# EAGLE board Thermostat_ADT6401_Breakout-Panel (EAGLE 9.6.0), part 1 of 2
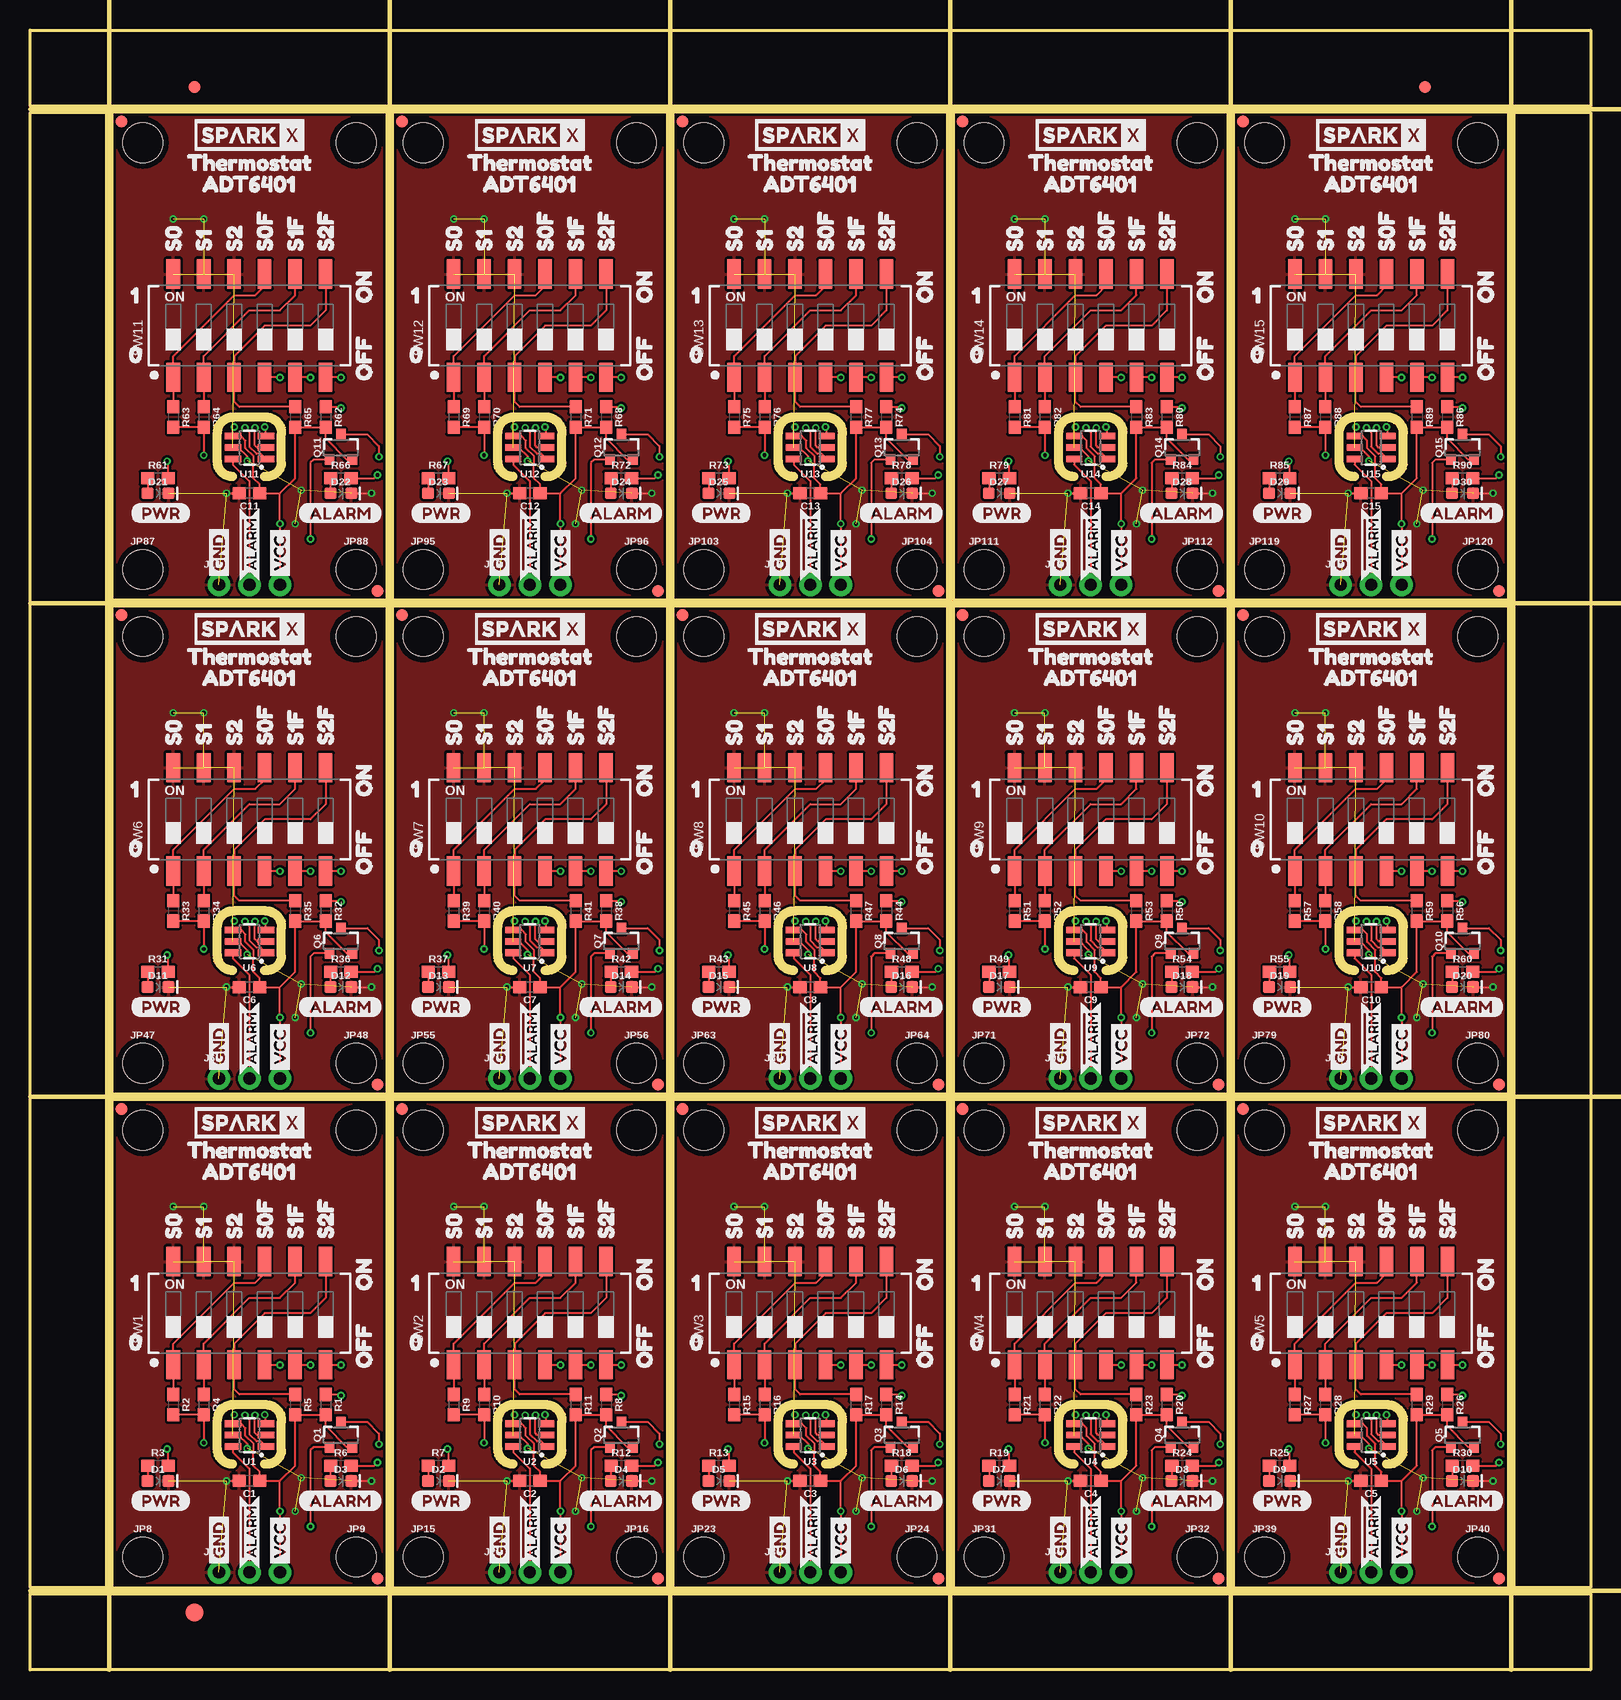
[diagram p0: board, top side]
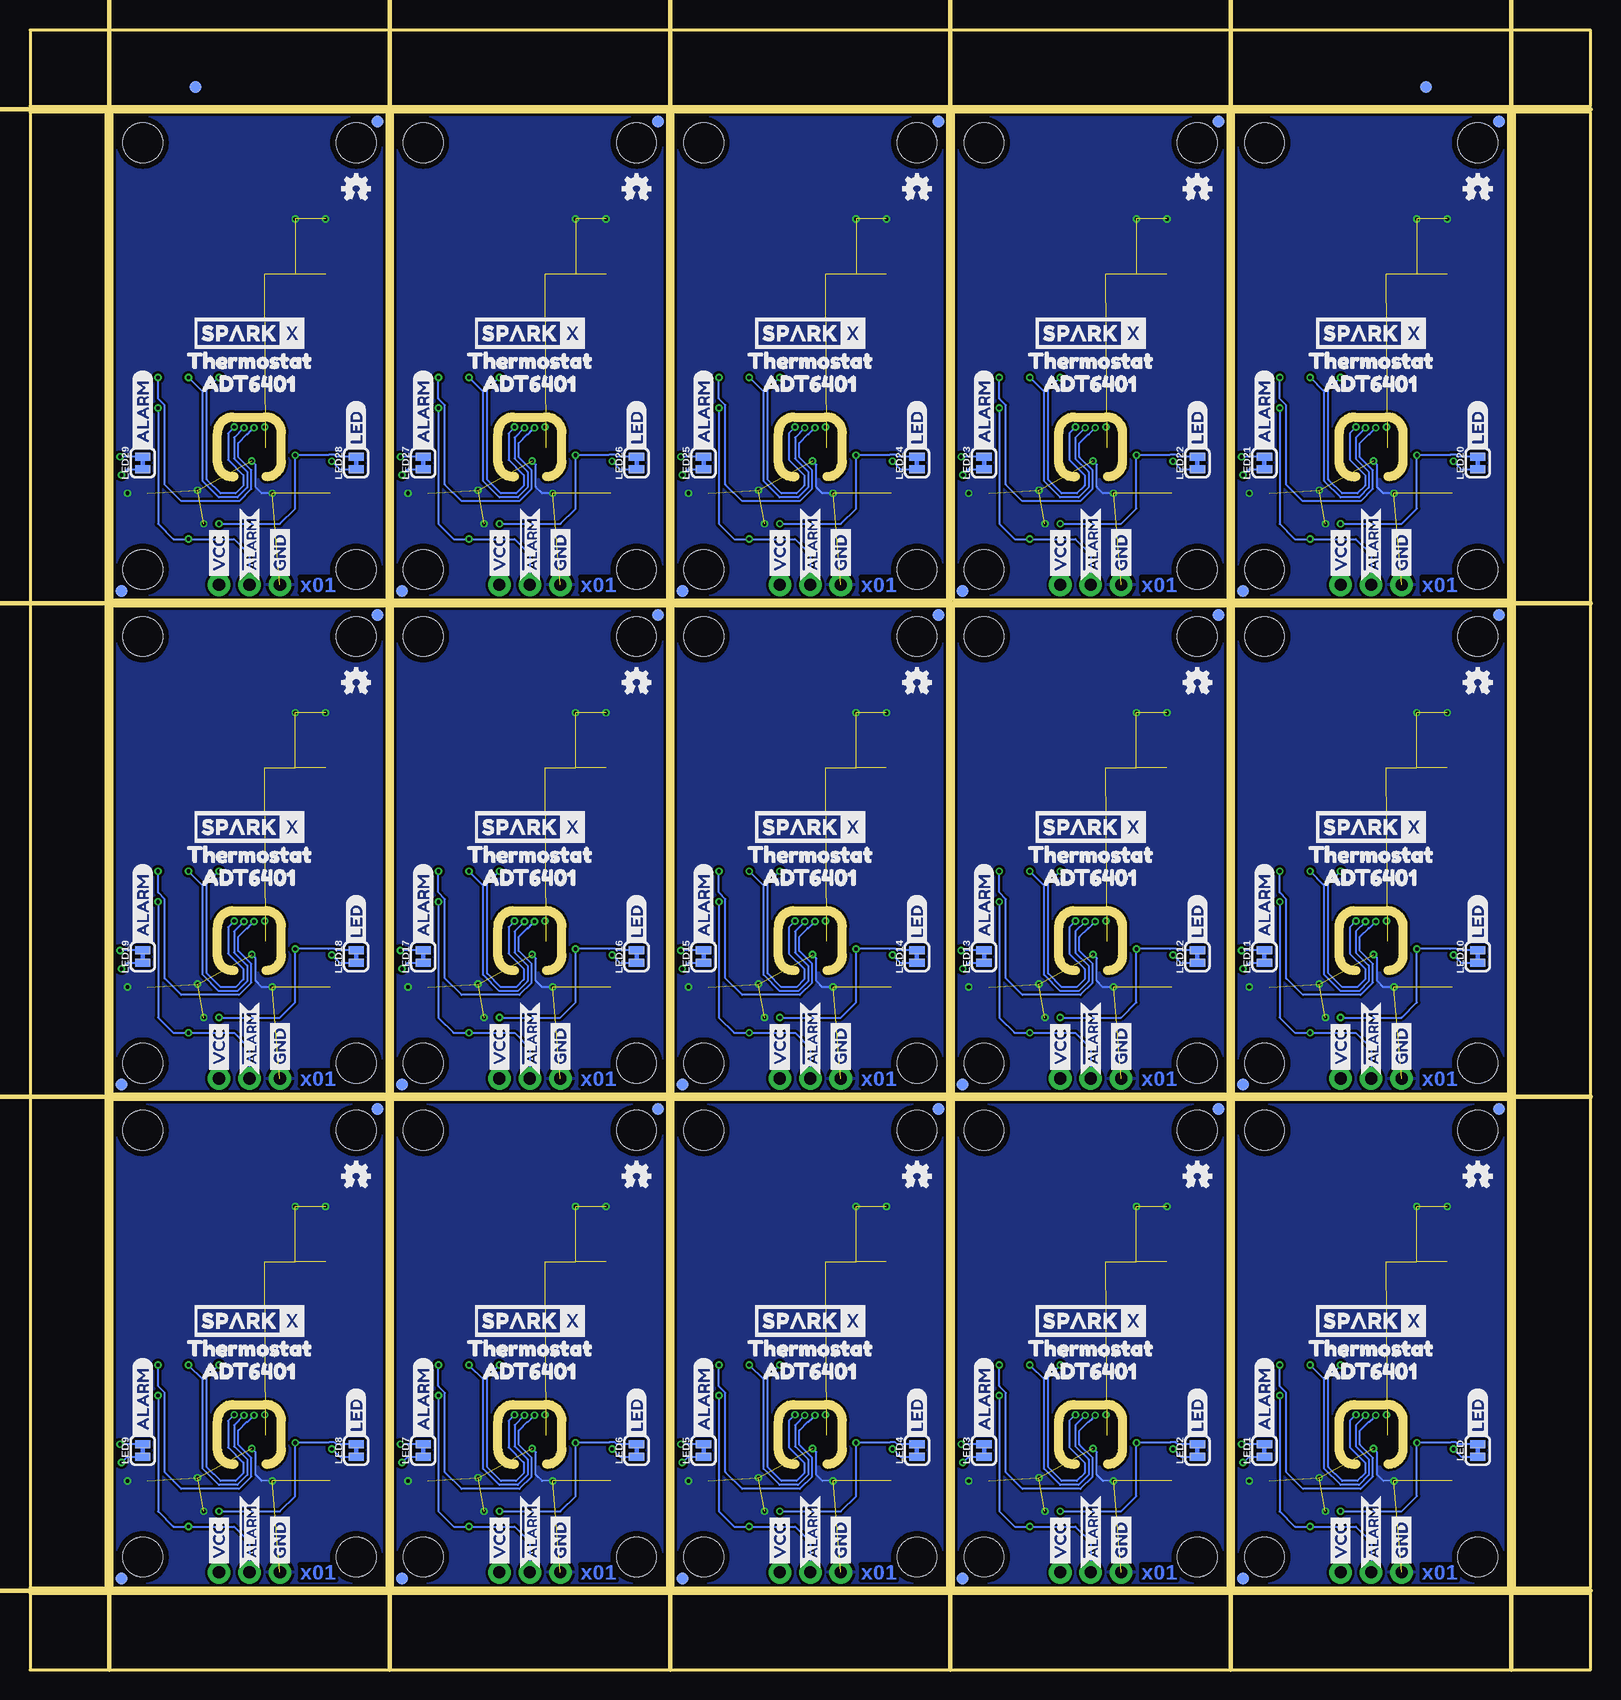
[diagram p1: board, bottom side, seen from below]

Size 130.05 x 136.65 mm. Coordinates in mm from the lower left corner, seen from the top.
Outline: 181 segments
Copper layers (1*16): Top 0.035mm / dielectric 1.5mm / Bottom 0.035mm
Design rules "Thermostat_ADT6401_Breakout": minimum track width 6mil, minimum drill 0.3mm, track to track 6mil, track to pad 6mil, pad to pad 6mil, via to via 6mil, smd to smd 6mil, copper to edge 6mil, drill to drill 6mil, minimum pad ring 6mil, minimum via ring 6mil, stop-mask expansion 4mil, vias tented up to drill 25mil, thermal gap 10mil
Milling: 10 lines

## Footprints (pad centres in the part's own frame; a part is rotated, then mirrored left to right if it is on the bottom)
0603 = smd 1.1 x 1: 1 -0.85,0; 2 0.85,0
LED-0603 = smd 1 x 1: A -0.877,0; C 0.877,0
FIDUCIAL-1X2 = smd 1 x 1: 1 0,0
FIDUCIAL-1.5X3 = smd 1.5 x 1.5: 1 0,0
1X03_NO_SILK = drill 1.016 pad 1.88: 1 0,0; 2 2.54,0; 3 5.08,0
STAND-OFF = hole 3.302: 0,0
SMT-JUMPER_2_NC_TRACE_SILK = smd 0.66 x 1.27: 1 -0.521,0; 2 0.521,0
SOT23-3 = smd 0.8 x 0.9: 1 -0.95,-1; 2 0.95,-1; 3 0,1.1
DIPSWITCH-06-SMD = smd 1.13 x 2.44: 1 -6.35,-4.3; 2 -3.81,-4.3; 3 -1.27,-4.3; 4 1.27,-4.3; 5 3.81,-4.3; 6 6.35,-4.3; 7 6.35,4.3; 8 3.81,4.3; 9 1.27,4.3; 10 -1.27,4.3; 11 -3.81,4.3; 12 -6.35,4.3
SOT23-6 = smd 0.55 x 1.35: 1 -0.95,-1.375; 2 0,-1.375; 3 0.95,-1.375; 4 0.95,1.375; 5 0,1.375; 6 -0.95,1.375

## Placement (x,y rotation side)
C1  0.1uF  [0603]  18.29,15.75 180 top
C2  0.1uF  [0603]  41.66,15.75 180 top
C3  0.1uF  [0603]  65.02,15.75 180 top
C4  0.1uF  [0603]  88.39,15.75 180 top
C5  0.1uF  [0603]  111.76,15.75 180 top
C6  0.1uF  [0603]  18.29,56.9 180 top
C7  0.1uF  [0603]  41.66,56.9 180 top
C8  0.1uF  [0603]  65.02,56.9 180 top
C9  0.1uF  [0603]  88.39,56.9 180 top
C10  0.1uF  [0603]  111.76,56.9 180 top
C11  0.1uF  [0603]  18.29,98.04 180 top
C12  0.1uF  [0603]  41.66,98.04 180 top
C13  0.1uF  [0603]  65.02,98.04 180 top
C14  0.1uF  [0603]  88.39,98.04 180 top
C15  0.1uF  [0603]  111.76,98.04 180 top
D1  RED  [LED-0603]  10.67,15.75 0 top
D2  RED  [LED-0603]  34.04,15.75 0 top
D3  Yellow  [LED-0603]  25.91,15.75 0 top
D4  Yellow  [LED-0603]  49.28,15.75 0 top
D5  RED  [LED-0603]  57.4,15.75 0 top
D6  Yellow  [LED-0603]  72.64,15.75 0 top
D7  RED  [LED-0603]  80.77,15.75 0 top
D8  Yellow  [LED-0603]  96.01,15.75 0 top
D9  RED  [LED-0603]  104.14,15.75 0 top
D10  Yellow  [LED-0603]  119.38,15.75 0 top
D11  RED  [LED-0603]  10.67,56.9 0 top
D12  Yellow  [LED-0603]  25.91,56.9 0 top
D13  RED  [LED-0603]  34.04,56.9 0 top
D14  Yellow  [LED-0603]  49.28,56.9 0 top
D15  RED  [LED-0603]  57.4,56.9 0 top
D16  Yellow  [LED-0603]  72.64,56.9 0 top
D17  RED  [LED-0603]  80.77,56.9 0 top
D18  Yellow  [LED-0603]  96.01,56.9 0 top
D19  RED  [LED-0603]  104.14,56.9 0 top
D20  Yellow  [LED-0603]  119.38,56.9 0 top
D21  RED  [LED-0603]  10.67,98.04 0 top
D22  Yellow  [LED-0603]  25.91,98.04 0 top
D23  RED  [LED-0603]  34.04,98.04 0 top
D24  Yellow  [LED-0603]  49.28,98.04 0 top
D25  RED  [LED-0603]  57.4,98.04 0 top
D26  Yellow  [LED-0603]  72.64,98.04 0 top
D27  RED  [LED-0603]  80.77,98.04 0 top
D28  Yellow  [LED-0603]  96.01,98.04 0 top
D29  RED  [LED-0603]  104.14,98.04 0 top
D30  Yellow  [LED-0603]  119.38,98.04 0 top
E$1  [FIDUCIAL-1X2]  13.72,131.89 0 top
E$2  [FIDUCIAL-1X2]  13.72,131.89 0 bottom
E$3  [FIDUCIAL-1X2]  116.27,131.89 0 top
E$4  [FIDUCIAL-1X2]  116.27,131.89 0 bottom
E$5  [FIDUCIAL-1.5X3]  13.72,4.76 0 top
J1  [1X03_NO_SILK]  15.75,8.13 0 top
J2  [1X03_NO_SILK]  39.12,8.13 0 top
J3  [1X03_NO_SILK]  62.48,8.13 0 top
J4  [1X03_NO_SILK]  85.85,8.13 0 top
J5  [1X03_NO_SILK]  109.22,8.13 0 top
J6  [1X03_NO_SILK]  15.75,49.28 0 top
J7  [1X03_NO_SILK]  39.12,49.28 0 top
J8  [1X03_NO_SILK]  62.48,49.28 0 top
J9  [1X03_NO_SILK]  85.85,49.28 0 top
J10  [1X03_NO_SILK]  109.22,49.28 0 top
J11  [1X03_NO_SILK]  15.75,90.42 0 top
J12  [1X03_NO_SILK]  39.12,90.42 0 top
J13  [1X03_NO_SILK]  62.48,90.42 0 top
J14  [1X03_NO_SILK]  85.85,90.42 0 top
J15  [1X03_NO_SILK]  109.22,90.42 0 top
JP1  FIDUCIAL1X2  [FIDUCIAL-1X2]  7.62,46.74 0 bottom
JP2  FIDUCIAL1X2  [FIDUCIAL-1X2]  28.96,7.62 0 top
JP3  STAND-OFF  [STAND-OFF]  9.4,44.96 0 top
JP4  STAND-OFF  [STAND-OFF]  27.18,44.96 0 top
JP5  FIDUCIAL1X2  [FIDUCIAL-1X2]  28.96,7.62 0 bottom
JP6  FIDUCIAL1X2  [FIDUCIAL-1X2]  7.62,46.74 0 top
JP7  STAND-OFF  [STAND-OFF]  32.77,44.96 0 top
JP8  STAND-OFF  [STAND-OFF]  9.4,9.4 0 top
JP9  STAND-OFF  [STAND-OFF]  27.18,9.4 0 top
JP10  STAND-OFF  [STAND-OFF]  50.55,44.96 0 top
JP11  FIDUCIAL1X2  [FIDUCIAL-1X2]  52.32,7.62 0 top
JP12  FIDUCIAL1X2  [FIDUCIAL-1X2]  30.99,46.74 0 top
JP13  FIDUCIAL1X2  [FIDUCIAL-1X2]  30.99,46.74 0 bottom
JP14  FIDUCIAL1X2  [FIDUCIAL-1X2]  52.32,7.62 0 bottom
JP15  STAND-OFF  [STAND-OFF]  32.77,9.4 0 top
JP16  STAND-OFF  [STAND-OFF]  50.55,9.4 0 top
JP17  STAND-OFF  [STAND-OFF]  56.13,44.96 0 top
JP18  STAND-OFF  [STAND-OFF]  73.91,44.96 0 top
JP19  FIDUCIAL1X2  [FIDUCIAL-1X2]  75.69,7.62 0 top
JP20  FIDUCIAL1X2  [FIDUCIAL-1X2]  54.36,46.74 0 top
JP21  FIDUCIAL1X2  [FIDUCIAL-1X2]  54.36,46.74 0 bottom
JP22  FIDUCIAL1X2  [FIDUCIAL-1X2]  75.69,7.62 0 bottom
JP23  STAND-OFF  [STAND-OFF]  56.13,9.4 0 top
JP24  STAND-OFF  [STAND-OFF]  73.91,9.4 0 top
JP25  STAND-OFF  [STAND-OFF]  79.5,44.96 0 top
JP26  STAND-OFF  [STAND-OFF]  97.28,44.96 0 top
JP27  FIDUCIAL1X2  [FIDUCIAL-1X2]  99.06,7.62 0 top
JP28  FIDUCIAL1X2  [FIDUCIAL-1X2]  77.72,46.74 0 top
JP29  FIDUCIAL1X2  [FIDUCIAL-1X2]  77.72,46.74 0 bottom
JP30  FIDUCIAL1X2  [FIDUCIAL-1X2]  99.06,7.62 0 bottom
JP31  STAND-OFF  [STAND-OFF]  79.5,9.4 0 top
JP32  STAND-OFF  [STAND-OFF]  97.28,9.4 0 top
JP33  STAND-OFF  [STAND-OFF]  102.87,44.96 0 top
JP34  STAND-OFF  [STAND-OFF]  120.65,44.96 0 top
JP35  FIDUCIAL1X2  [FIDUCIAL-1X2]  122.43,7.62 0 top
JP36  FIDUCIAL1X2  [FIDUCIAL-1X2]  101.09,46.74 0 top
JP37  FIDUCIAL1X2  [FIDUCIAL-1X2]  101.09,46.74 0 bottom
JP38  FIDUCIAL1X2  [FIDUCIAL-1X2]  122.43,7.62 0 bottom
JP39  STAND-OFF  [STAND-OFF]  102.87,9.4 0 top
JP40  STAND-OFF  [STAND-OFF]  120.65,9.4 0 top
JP41  STAND-OFF  [STAND-OFF]  9.4,86.11 0 top
JP42  STAND-OFF  [STAND-OFF]  27.18,86.11 0 top
JP43  FIDUCIAL1X2  [FIDUCIAL-1X2]  28.96,48.77 0 top
JP44  FIDUCIAL1X2  [FIDUCIAL-1X2]  7.62,87.88 0 top
JP45  FIDUCIAL1X2  [FIDUCIAL-1X2]  7.62,87.88 0 bottom
JP46  FIDUCIAL1X2  [FIDUCIAL-1X2]  28.96,48.77 0 bottom
JP47  STAND-OFF  [STAND-OFF]  9.4,50.55 0 top
JP48  STAND-OFF  [STAND-OFF]  27.18,50.55 0 top
JP49  STAND-OFF  [STAND-OFF]  32.77,86.11 0 top
JP50  STAND-OFF  [STAND-OFF]  50.55,86.11 0 top
JP51  FIDUCIAL1X2  [FIDUCIAL-1X2]  52.32,48.77 0 top
JP52  FIDUCIAL1X2  [FIDUCIAL-1X2]  30.99,87.88 0 top
JP53  FIDUCIAL1X2  [FIDUCIAL-1X2]  30.99,87.88 0 bottom
JP54  FIDUCIAL1X2  [FIDUCIAL-1X2]  52.32,48.77 0 bottom
JP55  STAND-OFF  [STAND-OFF]  32.77,50.55 0 top
JP56  STAND-OFF  [STAND-OFF]  50.55,50.55 0 top
JP57  STAND-OFF  [STAND-OFF]  56.13,86.11 0 top
JP58  STAND-OFF  [STAND-OFF]  73.91,86.11 0 top
JP59  FIDUCIAL1X2  [FIDUCIAL-1X2]  75.69,48.77 0 top
JP60  FIDUCIAL1X2  [FIDUCIAL-1X2]  54.36,87.88 0 top
JP61  FIDUCIAL1X2  [FIDUCIAL-1X2]  54.36,87.88 0 bottom
JP62  FIDUCIAL1X2  [FIDUCIAL-1X2]  75.69,48.77 0 bottom
JP63  STAND-OFF  [STAND-OFF]  56.13,50.55 0 top
JP64  STAND-OFF  [STAND-OFF]  73.91,50.55 0 top
JP65  STAND-OFF  [STAND-OFF]  79.5,86.11 0 top
JP66  STAND-OFF  [STAND-OFF]  97.28,86.11 0 top
JP67  FIDUCIAL1X2  [FIDUCIAL-1X2]  99.06,48.77 0 top
JP68  FIDUCIAL1X2  [FIDUCIAL-1X2]  77.72,87.88 0 top
JP69  FIDUCIAL1X2  [FIDUCIAL-1X2]  77.72,87.88 0 bottom
JP70  FIDUCIAL1X2  [FIDUCIAL-1X2]  99.06,48.77 0 bottom
JP71  STAND-OFF  [STAND-OFF]  79.5,50.55 0 top
JP72  STAND-OFF  [STAND-OFF]  97.28,50.55 0 top
JP73  STAND-OFF  [STAND-OFF]  102.87,86.11 0 top
JP74  STAND-OFF  [STAND-OFF]  120.65,86.11 0 top
JP75  FIDUCIAL1X2  [FIDUCIAL-1X2]  122.43,48.77 0 top
JP76  FIDUCIAL1X2  [FIDUCIAL-1X2]  101.09,87.88 0 top
JP77  FIDUCIAL1X2  [FIDUCIAL-1X2]  101.09,87.88 0 bottom
JP78  FIDUCIAL1X2  [FIDUCIAL-1X2]  122.43,48.77 0 bottom
JP79  STAND-OFF  [STAND-OFF]  102.87,50.55 0 top
JP80  STAND-OFF  [STAND-OFF]  120.65,50.55 0 top
JP81  STAND-OFF  [STAND-OFF]  9.4,127.25 0 top
JP82  STAND-OFF  [STAND-OFF]  27.18,127.25 0 top
JP83  FIDUCIAL1X2  [FIDUCIAL-1X2]  28.96,89.92 0 top
JP84  FIDUCIAL1X2  [FIDUCIAL-1X2]  7.62,129.03 0 top
JP85  FIDUCIAL1X2  [FIDUCIAL-1X2]  7.62,129.03 0 bottom
JP86  FIDUCIAL1X2  [FIDUCIAL-1X2]  28.96,89.92 0 bottom
JP87  STAND-OFF  [STAND-OFF]  9.4,91.69 0 top
JP88  STAND-OFF  [STAND-OFF]  27.18,91.69 0 top
JP89  STAND-OFF  [STAND-OFF]  32.77,127.25 0 top
JP90  STAND-OFF  [STAND-OFF]  50.55,127.25 0 top
JP91  FIDUCIAL1X2  [FIDUCIAL-1X2]  52.32,89.92 0 top
JP92  FIDUCIAL1X2  [FIDUCIAL-1X2]  30.99,129.03 0 top
JP93  FIDUCIAL1X2  [FIDUCIAL-1X2]  30.99,129.03 0 bottom
JP94  FIDUCIAL1X2  [FIDUCIAL-1X2]  52.32,89.92 0 bottom
JP95  STAND-OFF  [STAND-OFF]  32.77,91.69 0 top
JP96  STAND-OFF  [STAND-OFF]  50.55,91.69 0 top
JP97  STAND-OFF  [STAND-OFF]  56.13,127.25 0 top
JP98  STAND-OFF  [STAND-OFF]  73.91,127.25 0 top
JP99  FIDUCIAL1X2  [FIDUCIAL-1X2]  75.69,89.92 0 top
JP100  FIDUCIAL1X2  [FIDUCIAL-1X2]  54.36,129.03 0 top
JP101  FIDUCIAL1X2  [FIDUCIAL-1X2]  54.36,129.03 0 bottom
JP102  FIDUCIAL1X2  [FIDUCIAL-1X2]  75.69,89.92 0 bottom
JP103  STAND-OFF  [STAND-OFF]  56.13,91.69 0 top
JP104  STAND-OFF  [STAND-OFF]  73.91,91.69 0 top
JP105  STAND-OFF  [STAND-OFF]  79.5,127.25 0 top
JP106  STAND-OFF  [STAND-OFF]  97.28,127.25 0 top
JP107  FIDUCIAL1X2  [FIDUCIAL-1X2]  99.06,89.92 0 top
JP108  FIDUCIAL1X2  [FIDUCIAL-1X2]  77.72,129.03 0 top
JP109  FIDUCIAL1X2  [FIDUCIAL-1X2]  77.72,129.03 0 bottom
JP110  FIDUCIAL1X2  [FIDUCIAL-1X2]  99.06,89.92 0 bottom
JP111  STAND-OFF  [STAND-OFF]  79.5,91.69 0 top
JP112  STAND-OFF  [STAND-OFF]  97.28,91.69 0 top
JP113  STAND-OFF  [STAND-OFF]  102.87,127.25 0 top
JP114  STAND-OFF  [STAND-OFF]  120.65,127.25 0 top
JP115  FIDUCIAL1X2  [FIDUCIAL-1X2]  122.43,89.92 0 top
JP116  FIDUCIAL1X2  [FIDUCIAL-1X2]  101.09,129.03 0 top
JP117  FIDUCIAL1X2  [FIDUCIAL-1X2]  101.09,129.03 0 bottom
JP118  FIDUCIAL1X2  [FIDUCIAL-1X2]  122.43,89.92 0 bottom
JP119  STAND-OFF  [STAND-OFF]  102.87,91.69 0 top
JP120  STAND-OFF  [STAND-OFF]  120.65,91.69 0 top
LED  [SMT-JUMPER_2_NC_TRACE_SILK]  9.4,18.29 90 bottom
LED1  [SMT-JUMPER_2_NC_TRACE_SILK]  27.18,18.29 90 bottom
LED2  [SMT-JUMPER_2_NC_TRACE_SILK]  32.77,18.29 90 bottom
LED3  [SMT-JUMPER_2_NC_TRACE_SILK]  50.55,18.29 90 bottom
LED4  [SMT-JUMPER_2_NC_TRACE_SILK]  56.13,18.29 90 bottom
LED5  [SMT-JUMPER_2_NC_TRACE_SILK]  73.91,18.29 90 bottom
LED6  [SMT-JUMPER_2_NC_TRACE_SILK]  79.5,18.29 90 bottom
LED7  [SMT-JUMPER_2_NC_TRACE_SILK]  97.28,18.29 90 bottom
LED8  [SMT-JUMPER_2_NC_TRACE_SILK]  102.87,18.29 90 bottom
LED9  [SMT-JUMPER_2_NC_TRACE_SILK]  120.65,18.29 90 bottom
LED10  [SMT-JUMPER_2_NC_TRACE_SILK]  9.4,59.44 90 bottom
LED11  [SMT-JUMPER_2_NC_TRACE_SILK]  27.18,59.44 90 bottom
LED12  [SMT-JUMPER_2_NC_TRACE_SILK]  32.77,59.44 90 bottom
LED13  [SMT-JUMPER_2_NC_TRACE_SILK]  50.55,59.44 90 bottom
LED14  [SMT-JUMPER_2_NC_TRACE_SILK]  56.13,59.44 90 bottom
LED15  [SMT-JUMPER_2_NC_TRACE_SILK]  73.91,59.44 90 bottom
LED16  [SMT-JUMPER_2_NC_TRACE_SILK]  79.5,59.44 90 bottom
LED17  [SMT-JUMPER_2_NC_TRACE_SILK]  97.28,59.44 90 bottom
LED18  [SMT-JUMPER_2_NC_TRACE_SILK]  102.87,59.44 90 bottom
LED19  [SMT-JUMPER_2_NC_TRACE_SILK]  120.65,59.44 90 bottom
LED20  [SMT-JUMPER_2_NC_TRACE_SILK]  9.4,100.58 90 bottom
LED21  [SMT-JUMPER_2_NC_TRACE_SILK]  27.18,100.58 90 bottom
LED22  [SMT-JUMPER_2_NC_TRACE_SILK]  32.77,100.58 90 bottom
LED23  [SMT-JUMPER_2_NC_TRACE_SILK]  50.55,100.58 90 bottom
LED24  [SMT-JUMPER_2_NC_TRACE_SILK]  56.13,100.58 90 bottom
LED25  [SMT-JUMPER_2_NC_TRACE_SILK]  73.91,100.58 90 bottom
LED26  [SMT-JUMPER_2_NC_TRACE_SILK]  79.5,100.58 90 bottom
LED27  [SMT-JUMPER_2_NC_TRACE_SILK]  97.28,100.58 90 bottom
LED28  [SMT-JUMPER_2_NC_TRACE_SILK]  102.87,100.58 90 bottom
LED29  [SMT-JUMPER_2_NC_TRACE_SILK]  120.65,100.58 90 bottom
LOGO1  OSHW-LOGOMINI  [OSHW-LOGO-MINI]  9.4,41.15 0 bottom
LOGO2  OSHW-LOGOMINI  [OSHW-LOGO-MINI]  32.77,41.15 0 bottom
LOGO3  OSHW-LOGOMINI  [OSHW-LOGO-MINI]  56.13,41.15 0 bottom
LOGO4  OSHW-LOGOMINI  [OSHW-LOGO-MINI]  79.5,41.15 0 bottom
LOGO5  OSHW-LOGOMINI  [OSHW-LOGO-MINI]  102.87,41.15 0 bottom
LOGO6  OSHW-LOGOMINI  [OSHW-LOGO-MINI]  9.4,82.3 0 bottom
LOGO7  OSHW-LOGOMINI  [OSHW-LOGO-MINI]  32.77,82.3 0 bottom
LOGO8  OSHW-LOGOMINI  [OSHW-LOGO-MINI]  56.13,82.3 0 bottom
LOGO9  OSHW-LOGOMINI  [OSHW-LOGO-MINI]  79.5,82.3 0 bottom
LOGO10  OSHW-LOGOMINI  [OSHW-LOGO-MINI]  102.87,82.3 0 bottom
LOGO11  OSHW-LOGOMINI  [OSHW-LOGO-MINI]  9.4,123.44 0 bottom
LOGO12  OSHW-LOGOMINI  [OSHW-LOGO-MINI]  32.77,123.44 0 bottom
LOGO13  OSHW-LOGOMINI  [OSHW-LOGO-MINI]  56.13,123.44 0 bottom
LOGO14  OSHW-LOGOMINI  [OSHW-LOGO-MINI]  79.5,123.44 0 bottom
LOGO15  OSHW-LOGOMINI  [OSHW-LOGO-MINI]  102.87,123.44 0 bottom
Q1  20V/4.2A/52mΩ/1.4W  [SOT23-3]  25.91,19.56 0 top
Q2  20V/4.2A/52mΩ/1.4W  [SOT23-3]  49.28,19.56 0 top
Q3  20V/4.2A/52mΩ/1.4W  [SOT23-3]  72.64,19.56 0 top
Q4  20V/4.2A/52mΩ/1.4W  [SOT23-3]  96.01,19.56 0 top
Q5  20V/4.2A/52mΩ/1.4W  [SOT23-3]  119.38,19.56 0 top
Q6  20V/4.2A/52mΩ/1.4W  [SOT23-3]  25.91,60.71 0 top
Q7  20V/4.2A/52mΩ/1.4W  [SOT23-3]  49.28,60.71 0 top
Q8  20V/4.2A/52mΩ/1.4W  [SOT23-3]  72.64,60.71 0 top
Q9  20V/4.2A/52mΩ/1.4W  [SOT23-3]  96.01,60.71 0 top
Q10  20V/4.2A/52mΩ/1.4W  [SOT23-3]  119.38,60.71 0 top
Q11  20V/4.2A/52mΩ/1.4W  [SOT23-3]  25.91,101.85 0 top
Q12  20V/4.2A/52mΩ/1.4W  [SOT23-3]  49.28,101.85 0 top
Q13  20V/4.2A/52mΩ/1.4W  [SOT23-3]  72.64,101.85 0 top
Q14  20V/4.2A/52mΩ/1.4W  [SOT23-3]  96.01,101.85 0 top
Q15  20V/4.2A/52mΩ/1.4W  [SOT23-3]  119.38,101.85 0 top
R1  100k  [0603]  24.64,22.1 270 top
R2  100k  [0603]  11.94,22.1 270 top
R3  1k  [0603]  10.67,17.02 0 top
R4  100k  [0603]  14.48,22.1 270 top
R5  100k  [0603]  22.1,22.1 270 top
R6  1k  [0603]  25.91,17.02 0 top
R7  1k  [0603]  34.04,17.02 0 top
R8  100k  [0603]  48.01,22.1 270 top
R9  100k  [0603]  35.31,22.1 270 top
R10  100k  [0603]  37.85,22.1 270 top
R11  100k  [0603]  45.47,22.1 270 top
R12  1k  [0603]  49.28,17.02 0 top
R13  1k  [0603]  57.4,17.02 0 top
R14  100k  [0603]  71.37,22.1 270 top
R15  100k  [0603]  58.67,22.1 270 top
R16  100k  [0603]  61.21,22.1 270 top
R17  100k  [0603]  68.83,22.1 270 top
R18  1k  [0603]  72.64,17.02 0 top
R19  1k  [0603]  80.77,17.02 0 top
R20  100k  [0603]  94.74,22.1 270 top
R21  100k  [0603]  82.04,22.1 270 top
R22  100k  [0603]  84.58,22.1 270 top
R23  100k  [0603]  92.2,22.1 270 top
R24  1k  [0603]  96.01,17.02 0 top
R25  1k  [0603]  104.14,17.02 0 top
R26  100k  [0603]  118.11,22.1 270 top
R27  100k  [0603]  105.41,22.1 270 top
R28  100k  [0603]  107.95,22.1 270 top
R29  100k  [0603]  115.57,22.1 270 top
R30  1k  [0603]  119.38,17.02 0 top
R31  1k  [0603]  10.67,58.17 0 top
R32  100k  [0603]  24.64,63.25 270 top
R33  100k  [0603]  11.94,63.25 270 top
R34  100k  [0603]  14.48,63.25 270 top
R35  100k  [0603]  22.1,63.25 270 top
R36  1k  [0603]  25.91,58.17 0 top
R37  1k  [0603]  34.04,58.17 0 top
R38  100k  [0603]  48.01,63.25 270 top
R39  100k  [0603]  35.31,63.25 270 top
R40  100k  [0603]  37.85,63.25 270 top
R41  100k  [0603]  45.47,63.25 270 top
R42  1k  [0603]  49.28,58.17 0 top
R43  1k  [0603]  57.4,58.17 0 top
R44  100k  [0603]  71.37,63.25 270 top
R45  100k  [0603]  58.67,63.25 270 top
R46  100k  [0603]  61.21,63.25 270 top
R47  100k  [0603]  68.83,63.25 270 top
R48  1k  [0603]  72.64,58.17 0 top
R49  1k  [0603]  80.77,58.17 0 top
R50  100k  [0603]  94.74,63.25 270 top
R51  100k  [0603]  82.04,63.25 270 top
R52  100k  [0603]  84.58,63.25 270 top
R53  100k  [0603]  92.2,63.25 270 top
R54  1k  [0603]  96.01,58.17 0 top
R55  1k  [0603]  104.14,58.17 0 top
R56  100k  [0603]  118.11,63.25 270 top
R57  100k  [0603]  105.41,63.25 270 top
R58  100k  [0603]  107.95,63.25 270 top
R59  100k  [0603]  115.57,63.25 270 top
R60  1k  [0603]  119.38,58.17 0 top
R61  1k  [0603]  10.67,99.31 0 top
R62  100k  [0603]  24.64,104.39 270 top
R63  100k  [0603]  11.94,104.39 270 top
R64  100k  [0603]  14.48,104.39 270 top
R65  100k  [0603]  22.1,104.39 270 top
R66  1k  [0603]  25.91,99.31 0 top
R67  1k  [0603]  34.04,99.31 0 top
R68  100k  [0603]  48.01,104.39 270 top
R69  100k  [0603]  35.31,104.39 270 top
R70  100k  [0603]  37.85,104.39 270 top
R71  100k  [0603]  45.47,104.39 270 top
R72  1k  [0603]  49.28,99.31 0 top
R73  1k  [0603]  57.4,99.31 0 top
R74  100k  [0603]  71.37,104.39 270 top
R75  100k  [0603]  58.67,104.39 270 top
R76  100k  [0603]  61.21,104.39 270 top
R77  100k  [0603]  68.83,104.39 270 top
R78  1k  [0603]  72.64,99.31 0 top
R79  1k  [0603]  80.77,99.31 0 top
R80  100k  [0603]  94.74,104.39 270 top
R81  100k  [0603]  82.04,104.39 270 top
R82  100k  [0603]  84.58,104.39 270 top
R83  100k  [0603]  92.2,104.39 270 top
R84  1k  [0603]  96.01,99.31 0 top
R85  1k  [0603]  104.14,99.31 0 top
R86  100k  [0603]  118.11,104.39 270 top
R87  100k  [0603]  105.41,104.39 270 top
R88  100k  [0603]  107.95,104.39 270 top
R89  100k  [0603]  115.57,104.39 270 top
R90  1k  [0603]  119.38,99.31 0 top
SW1  DIP-06  [DIPSWITCH-06-SMD]  18.29,29.72 0 top
SW2  DIP-06  [DIPSWITCH-06-SMD]  41.66,29.72 0 top
SW3  DIP-06  [DIPSWITCH-06-SMD]  65.02,29.72 0 top
SW4  DIP-06  [DIPSWITCH-06-SMD]  88.39,29.72 0 top
SW5  DIP-06  [DIPSWITCH-06-SMD]  111.76,29.72 0 top
SW6  DIP-06  [DIPSWITCH-06-SMD]  18.29,70.87 0 top
SW7  DIP-06  [DIPSWITCH-06-SMD]  41.66,70.87 0 top
SW8  DIP-06  [DIPSWITCH-06-SMD]  65.02,70.87 0 top
SW9  DIP-06  [DIPSWITCH-06-SMD]  88.39,70.87 0 top
SW10  DIP-06  [DIPSWITCH-06-SMD]  111.76,70.87 0 top
SW11  DIP-06  [DIPSWITCH-06-SMD]  18.29,112.01 0 top
SW12  DIP-06  [DIPSWITCH-06-SMD]  41.66,112.01 0 top
SW13  DIP-06  [DIPSWITCH-06-SMD]  65.02,112.01 0 top
SW14  DIP-06  [DIPSWITCH-06-SMD]  88.39,112.01 0 top
SW15  DIP-06  [DIPSWITCH-06-SMD]  111.76,112.01 0 top
U1  ADT6401  [SOT23-6]  18.29,19.56 90 top
U2  ADT6401  [SOT23-6]  41.66,19.56 90 top
U3  ADT6401  [SOT23-6]  65.02,19.56 90 top
U4  ADT6401  [SOT23-6]  88.39,19.56 90 top
U5  ADT6401  [SOT23-6]  111.76,19.56 90 top
U6  ADT6401  [SOT23-6]  18.29,60.71 90 top
U7  ADT6401  [SOT23-6]  41.66,60.71 90 top
U8  ADT6401  [SOT23-6]  65.02,60.71 90 top
U9  ADT6401  [SOT23-6]  88.39,60.71 90 top
U10  ADT6401  [SOT23-6]  111.76,60.71 90 top
U11  ADT6401  [SOT23-6]  18.29,101.85 90 top
U12  ADT6401  [SOT23-6]  41.66,101.85 90 top
U13  ADT6401  [SOT23-6]  65.02,101.85 90 top
U14  ADT6401  [SOT23-6]  88.39,101.85 90 top
U15  ADT6401  [SOT23-6]  111.76,101.85 90 top
U$1  SPARKX-LOGO4  [SPARKX-MEDIUM]  18.29,45.59 0 top
U$2  [01]  7.11,27.3 0 top
U$3  [#ALARM6]  18.29,8.25 90 top
U$4  [ADT64012]  23.37,24.89 0 bottom
U$5  [GND6]  15.75,8.38 90 top
U$6  [OFF3]  27.81,24 90 top
U$7  [ON2]  27.81,30.48 90 top
U$8  [10]  7.24,32.26 0 top
U$9  [THERMOSTAT0]  11.94,43.31 0 top
U$10  [(PWR)]  8.38,14.1 0 top
U$11  [VCC5]  20.83,8.38 90 top
U$12  [ADT64012]  13.21,41.53 0 top
U$13  [GND6]  15.75,8.38 90 bottom
U$14  [S1F5]  22.1,34.8 90 top
U$15  [#ALARM6]  18.29,8.25 90 bottom
U$16  [VCC5]  20.83,8.38 90 bottom
U$17  SPARKX-LOGO4  [SPARKX-MEDIUM]  18.29,29.08 0 bottom
U$18  SPARKX-LOGO4  [SPARKX-MEDIUM]  41.66,45.59 0 top
U$19  [THERMOSTAT0]  24.64,26.8 0 bottom
U$20  [ALARM1]  27.18,19.05 90 bottom
U$21  [S2F7]  24.64,34.8 90 top
U$22  [S12]  14.48,34.8 90 top
U$23  [S23]  17.02,34.8 90 top
U$24  [S00]  11.94,34.8 90 top
U$25  [S0F1]  19.56,34.8 90 top
U$26  [LED0]  9.4,18.92 90 bottom
U$27  [ALARM2]  22.35,14.1 0 top
U$28  [(PWR)]  31.75,14.1 0 top
U$29  [GND6]  39.12,8.38 90 top
U$30  [OFF3]  51.18,24 90 top
U$31  [ON2]  51.18,30.48 90 top
U$32  [THERMOSTAT0]  35.31,43.31 0 top
U$33  [VCC5]  44.2,8.38 90 top
U$34  [GND6]  39.12,8.38 90 bottom
U$35  [VCC5]  44.2,8.38 90 bottom
U$36  SPARKX-LOGO4  [SPARKX-MEDIUM]  41.66,29.08 0 bottom
U$37  [THERMOSTAT0]  48.01,26.8 0 bottom
U$38  [#ALARM6]  41.66,8.25 90 top
U$39  [#ALARM6]  41.66,8.25 90 bottom
U$40  [01]  30.48,27.3 0 top
U$41  [10]  30.61,32.26 0 top
U$42  [S1F5]  45.47,34.8 90 top
U$43  [S2F7]  48.01,34.8 90 top
U$44  [S12]  37.85,34.8 90 top
U$45  [S23]  40.39,34.8 90 top
U$46  [S00]  35.31,34.8 90 top
U$47  [S0F1]  42.93,34.8 90 top
U$48  [ALARM2]  45.72,14.1 0 top
U$49  [ADT64012]  36.58,41.53 0 top
U$50  [ADT64012]  46.74,24.89 0 bottom
U$51  [ALARM1]  50.55,19.05 90 bottom
U$52  [LED0]  32.77,18.92 90 bottom
U$53  SPARKX-LOGO4  [SPARKX-MEDIUM]  65.02,45.59 0 top
U$54  [(PWR)]  55.12,14.1 0 top
U$55  [GND6]  62.48,8.38 90 top
U$56  [OFF3]  74.55,24 90 top
U$57  [ON2]  74.55,30.48 90 top
U$58  [THERMOSTAT0]  58.67,43.31 0 top
U$59  [VCC5]  67.56,8.38 90 top
U$60  [GND6]  62.48,8.38 90 bottom
U$61  [VCC5]  67.56,8.38 90 bottom
U$62  SPARKX-LOGO4  [SPARKX-MEDIUM]  65.02,29.08 0 bottom
U$63  [THERMOSTAT0]  71.37,26.8 0 bottom
U$64  [#ALARM6]  65.02,8.25 90 top
U$65  [#ALARM6]  65.02,8.25 90 bottom
U$66  [01]  53.85,27.3 0 top
U$67  [10]  53.97,32.26 0 top
U$68  [S1F5]  68.83,34.8 90 top
U$69  [S2F7]  71.37,34.8 90 top
U$70  [S12]  61.21,34.8 90 top
U$71  [S23]  63.75,34.8 90 top
U$72  [S00]  58.67,34.8 90 top
U$73  [S0F1]  66.29,34.8 90 top
U$74  [ALARM2]  69.09,14.1 0 top
U$75  [ADT64012]  59.94,41.53 0 top
U$76  [ADT64012]  70.1,24.89 0 bottom
U$77  [ALARM1]  73.91,19.05 90 bottom
U$78  [LED0]  56.13,18.92 90 bottom
U$79  SPARKX-LOGO4  [SPARKX-MEDIUM]  88.39,45.59 0 top
U$80  [(PWR)]  78.49,14.1 0 top
U$81  [GND6]  85.85,8.38 90 top
U$82  [OFF3]  97.92,24 90 top
U$83  [ON2]  97.92,30.48 90 top
U$84  [THERMOSTAT0]  82.04,43.31 0 top
U$85  [VCC5]  90.93,8.38 90 top
U$86  [GND6]  85.85,8.38 90 bottom
U$87  [VCC5]  90.93,8.38 90 bottom
U$88  SPARKX-LOGO4  [SPARKX-MEDIUM]  88.39,29.08 0 bottom
U$89  [THERMOSTAT0]  94.74,26.8 0 bottom
U$90  [#ALARM6]  88.39,8.25 90 top
U$91  [#ALARM6]  88.39,8.25 90 bottom
U$92  [01]  77.22,27.3 0 top
U$93  [10]  77.34,32.26 0 top
U$94  [S1F5]  92.2,34.8 90 top
U$95  [S2F7]  94.74,34.8 90 top
U$96  [S12]  84.58,34.8 90 top
U$97  [S23]  87.12,34.8 90 top
U$98  [S00]  82.04,34.8 90 top
U$99  [S0F1]  89.66,34.8 90 top
U$100  [ALARM2]  92.46,14.1 0 top
U$101  [ADT64012]  83.31,41.53 0 top
U$102  [ADT64012]  93.47,24.89 0 bottom
U$103  [ALARM1]  97.28,19.05 90 bottom
U$104  [LED0]  79.5,18.92 90 bottom
U$105  SPARKX-LOGO4  [SPARKX-MEDIUM]  111.76,45.59 0 top
U$106  [(PWR)]  101.85,14.1 0 top
U$107  [GND6]  109.22,8.38 90 top
U$108  [OFF3]  121.29,24 90 top
U$109  [ON2]  121.29,30.48 90 top
U$110  [THERMOSTAT0]  105.41,43.31 0 top
U$111  [VCC5]  114.3,8.38 90 top
U$112  [GND6]  109.22,8.38 90 bottom
U$113  [VCC5]  114.3,8.38 90 bottom
U$114  SPARKX-LOGO4  [SPARKX-MEDIUM]  111.76,29.08 0 bottom
U$115  [THERMOSTAT0]  118.11,26.8 0 bottom
U$116  [#ALARM6]  111.76,8.25 90 top
U$117  [#ALARM6]  111.76,8.25 90 bottom
U$118  [01]  100.58,27.3 0 top
U$119  [10]  100.71,32.26 0 top
U$120  [S1F5]  115.57,34.8 90 top
U$121  [S2F7]  118.11,34.8 90 top
U$122  [S12]  107.95,34.8 90 top
U$123  [S23]  110.49,34.8 90 top
U$124  [S00]  105.41,34.8 90 top
U$125  [S0F1]  113.03,34.8 90 top
U$126  [ALARM2]  115.82,14.1 0 top
U$127  [ADT64012]  106.68,41.53 0 top
U$128  [ADT64012]  116.84,24.89 0 bottom
U$129  [ALARM1]  120.65,19.05 90 bottom
U$130  [LED0]  102.87,18.92 90 bottom
U$131  SPARKX-LOGO4  [SPARKX-MEDIUM]  18.29,86.74 0 top
U$132  [(PWR)]  8.38,55.24 0 top
U$133  [GND6]  15.75,49.53 90 top
U$134  [OFF3]  27.81,65.15 90 top
U$135  [ON2]  27.81,71.63 90 top
U$136  [THERMOSTAT0]  11.94,84.45 0 top
U$137  [VCC5]  20.83,49.53 90 top
U$138  [GND6]  15.75,49.53 90 bottom
U$139  [VCC5]  20.83,49.53 90 bottom
U$140  SPARKX-LOGO4  [SPARKX-MEDIUM]  18.29,70.23 0 bottom
U$141  [THERMOSTAT0]  24.64,67.95 0 bottom
U$142  [#ALARM6]  18.29,49.4 90 top
U$143  [#ALARM6]  18.29,49.4 90 bottom
U$144  [01]  7.11,68.45 0 top
U$145  [10]  7.24,73.41 0 top
U$146  [S1F5]  22.1,75.95 90 top
U$147  [S2F7]  24.64,75.95 90 top
U$148  [S12]  14.48,75.95 90 top
U$149  [S23]  17.02,75.95 90 top
U$150  [S00]  11.94,75.95 90 top
U$151  [S0F1]  19.56,75.95 90 top
U$152  [ALARM2]  22.35,55.24 0 top
U$153  [ADT64012]  13.21,82.68 0 top
U$154  [ADT64012]  23.37,66.04 0 bottom
U$155  [ALARM1]  27.18,60.2 90 bottom
U$156  [LED0]  9.4,60.07 90 bottom
U$157  SPARKX-LOGO4  [SPARKX-MEDIUM]  41.66,86.74 0 top
U$158  [(PWR)]  31.75,55.24 0 top
U$159  [GND6]  39.12,49.53 90 top
U$160  [OFF3]  51.18,65.15 90 top
U$161  [ON2]  51.18,71.63 90 top
U$162  [THERMOSTAT0]  35.31,84.45 0 top
U$163  [VCC5]  44.2,49.53 90 top
U$164  [GND6]  39.12,49.53 90 bottom
U$165  [VCC5]  44.2,49.53 90 bottom
U$166  SPARKX-LOGO4  [SPARKX-MEDIUM]  41.66,70.23 0 bottom
U$167  [THERMOSTAT0]  48.01,67.95 0 bottom
U$168  [#ALARM6]  41.66,49.4 90 top
U$169  [#ALARM6]  41.66,49.4 90 bottom
U$170  [01]  30.48,68.45 0 top
U$171  [10]  30.61,73.41 0 top
U$172  [S1F5]  45.47,75.95 90 top
U$173  [S2F7]  48.01,75.95 90 top
U$174  [S12]  37.85,75.95 90 top
U$175  [S23]  40.39,75.95 90 top
U$176  [S00]  35.31,75.95 90 top
U$177  [S0F1]  42.93,75.95 90 top
U$178  [ALARM2]  45.72,55.24 0 top
U$179  [ADT64012]  36.58,82.68 0 top
U$180  [ADT64012]  46.74,66.04 0 bottom
U$181  [ALARM1]  50.55,60.2 90 bottom
U$182  [LED0]  32.77,60.07 90 bottom
U$183  SPARKX-LOGO4  [SPARKX-MEDIUM]  65.02,86.74 0 top
U$184  [(PWR)]  55.12,55.24 0 top
U$185  [GND6]  62.48,49.53 90 top
U$186  [OFF3]  74.55,65.15 90 top
U$187  [ON2]  74.55,71.63 90 top
U$188  [THERMOSTAT0]  58.67,84.45 0 top
U$189  [VCC5]  67.56,49.53 90 top
U$190  [GND6]  62.48,49.53 90 bottom
U$191  [VCC5]  67.56,49.53 90 bottom
U$192  SPARKX-LOGO4  [SPARKX-MEDIUM]  65.02,70.23 0 bottom
U$193  [THERMOSTAT0]  71.37,67.95 0 bottom
U$194  [#ALARM6]  65.02,49.4 90 top
U$195  [#ALARM6]  65.02,49.4 90 bottom
U$196  [01]  53.85,68.45 0 top
U$197  [10]  53.97,73.41 0 top
U$198  [S1F5]  68.83,75.95 90 top
U$199  [S2F7]  71.37,75.95 90 top
U$200  [S12]  61.21,75.95 90 top
U$201  [S23]  63.75,75.95 90 top
U$202  [S00]  58.67,75.95 90 top
U$203  [S0F1]  66.29,75.95 90 top
U$204  [ALARM2]  69.09,55.24 0 top
U$205  [ADT64012]  59.94,82.68 0 top
U$206  [ADT64012]  70.1,66.04 0 bottom
U$207  [ALARM1]  73.91,60.2 90 bottom
U$208  [LED0]  56.13,60.07 90 bottom
U$209  SPARKX-LOGO4  [SPARKX-MEDIUM]  88.39,86.74 0 top
U$210  [(PWR)]  78.49,55.24 0 top
U$211  [GND6]  85.85,49.53 90 top
U$212  [OFF3]  97.92,65.15 90 top
U$213  [ON2]  97.92,71.63 90 top
U$214  [THERMOSTAT0]  82.04,84.45 0 top
U$215  [VCC5]  90.93,49.53 90 top
U$216  [GND6]  85.85,49.53 90 bottom
U$217  [VCC5]  90.93,49.53 90 bottom
U$218  SPARKX-LOGO4  [SPARKX-MEDIUM]  88.39,70.23 0 bottom
U$219  [THERMOSTAT0]  94.74,67.95 0 bottom
U$220  [#ALARM6]  88.39,49.4 90 top
U$221  [#ALARM6]  88.39,49.4 90 bottom
U$222  [01]  77.22,68.45 0 top
U$223  [10]  77.34,73.41 0 top
U$224  [S1F5]  92.2,75.95 90 top
U$225  [S2F7]  94.74,75.95 90 top
U$226  [S12]  84.58,75.95 90 top
U$227  [S23]  87.12,75.95 90 top
U$228  [S00]  82.04,75.95 90 top
U$229  [S0F1]  89.66,75.95 90 top
U$230  [ALARM2]  92.46,55.24 0 top
U$231  [ADT64012]  83.31,82.68 0 top
U$232  [ADT64012]  93.47,66.04 0 bottom
U$233  [ALARM1]  97.28,60.2 90 bottom
U$234  [LED0]  79.5,60.07 90 bottom
U$235  SPARKX-LOGO4  [SPARKX-MEDIUM]  111.76,86.74 0 top
U$236  [(PWR)]  101.85,55.24 0 top
U$237  [GND6]  109.22,49.53 90 top
U$238  [OFF3]  121.29,65.15 90 top
U$239  [ON2]  121.29,71.63 90 top
U$240  [THERMOSTAT0]  105.41,84.45 0 top
U$241  [VCC5]  114.3,49.53 90 top
U$242  [GND6]  109.22,49.53 90 bottom
U$243  [VCC5]  114.3,49.53 90 bottom
U$244  SPARKX-LOGO4  [SPARKX-MEDIUM]  111.76,70.23 0 bottom
U$245  [THERMOSTAT0]  118.11,67.95 0 bottom
U$246  [#ALARM6]  111.76,49.4 90 top
U$247  [#ALARM6]  111.76,49.4 90 bottom
U$248  [01]  100.58,68.45 0 top
U$249  [10]  100.71,73.41 0 top
U$250  [S1F5]  115.57,75.95 90 top
U$251  [S2F7]  118.11,75.95 90 top
U$252  [S12]  107.95,75.95 90 top
U$253  [S23]  110.49,75.95 90 top
U$254  [S00]  105.41,75.95 90 top
U$255  [S0F1]  113.03,75.95 90 top
U$256  [ALARM2]  115.82,55.24 0 top
U$257  [ADT64012]  106.68,82.68 0 top
U$258  [ADT64012]  116.84,66.04 0 bottom
U$259  [ALARM1]  120.65,60.2 90 bottom
U$260  [LED0]  102.87,60.07 90 bottom
U$261  SPARKX-LOGO4  [SPARKX-MEDIUM]  18.29,127.89 0 top
U$262  [(PWR)]  8.38,96.39 0 top
U$263  [GND6]  15.75,90.68 90 top
U$264  [OFF3]  27.81,106.3 90 top
U$265  [ON2]  27.81,112.78 90 top
U$266  [THERMOSTAT0]  11.94,125.6 0 top
U$267  [VCC5]  20.83,90.68 90 top
U$268  [GND6]  15.75,90.68 90 bottom
U$269  [VCC5]  20.83,90.68 90 bottom
U$270  SPARKX-LOGO4  [SPARKX-MEDIUM]  18.29,111.38 0 bottom
U$271  [THERMOSTAT0]  24.64,109.09 0 bottom
U$272  [#ALARM6]  18.29,90.55 90 top
U$273  [#ALARM6]  18.29,90.55 90 bottom
U$274  [01]  7.11,109.6 0 top
U$275  [10]  7.24,114.55 0 top
U$276  [S1F5]  22.1,117.09 90 top
U$277  [S2F7]  24.64,117.09 90 top
U$278  [S12]  14.48,117.09 90 top
U$279  [S23]  17.02,117.09 90 top
U$280  [S00]  11.94,117.09 90 top
U$281  [S0F1]  19.56,117.09 90 top
U$282  [ALARM2]  22.35,96.39 0 top
U$283  [ADT64012]  13.21,123.83 0 top
U$284  [ADT64012]  23.37,107.19 0 bottom
U$285  [ALARM1]  27.18,101.35 90 bottom
U$286  [LED0]  9.4,101.22 90 bottom
U$287  SPARKX-LOGO4  [SPARKX-MEDIUM]  41.66,127.89 0 top
U$288  [(PWR)]  31.75,96.39 0 top
U$289  [GND6]  39.12,90.68 90 top
U$290  [OFF3]  51.18,106.3 90 top
U$291  [ON2]  51.18,112.78 90 top
U$292  [THERMOSTAT0]  35.31,125.6 0 top
U$293  [VCC5]  44.2,90.68 90 top
U$294  [GND6]  39.12,90.68 90 bottom
U$295  [VCC5]  44.2,90.68 90 bottom
U$296  SPARKX-LOGO4  [SPARKX-MEDIUM]  41.66,111.38 0 bottom
U$297  [THERMOSTAT0]  48.01,109.09 0 bottom
U$298  [#ALARM6]  41.66,90.55 90 top
U$299  [#ALARM6]  41.66,90.55 90 bottom
U$300  [01]  30.48,109.6 0 top
U$301  [10]  30.61,114.55 0 top
U$302  [S1F5]  45.47,117.09 90 top
U$303  [S2F7]  48.01,117.09 90 top
U$304  [S12]  37.85,117.09 90 top
U$305  [S23]  40.39,117.09 90 top
U$306  [S00]  35.31,117.09 90 top
U$307  [S0F1]  42.93,117.09 90 top
U$308  [ALARM2]  45.72,96.39 0 top
U$309  [ADT64012]  36.58,123.83 0 top
U$310  [ADT64012]  46.74,107.19 0 bottom
U$311  [ALARM1]  50.55,101.35 90 bottom
U$312  [LED0]  32.77,101.22 90 bottom
U$313  SPARKX-LOGO4  [SPARKX-MEDIUM]  65.02,127.89 0 top
U$314  [(PWR)]  55.12,96.39 0 top
U$315  [GND6]  62.48,90.68 90 top
U$316  [OFF3]  74.55,106.3 90 top
U$317  [ON2]  74.55,112.78 90 top
U$318  [THERMOSTAT0]  58.67,125.6 0 top
U$319  [VCC5]  67.56,90.68 90 top
U$320  [GND6]  62.48,90.68 90 bottom
U$321  [VCC5]  67.56,90.68 90 bottom
U$322  SPARKX-LOGO4  [SPARKX-MEDIUM]  65.02,111.38 0 bottom
U$323  [THERMOSTAT0]  71.37,109.09 0 bottom
U$324  [#ALARM6]  65.02,90.55 90 top
U$325  [#ALARM6]  65.02,90.55 90 bottom
U$326  [01]  53.85,109.6 0 top
U$327  [10]  53.97,114.55 0 top
U$328  [S1F5]  68.83,117.09 90 top
U$329  [S2F7]  71.37,117.09 90 top
U$330  [S12]  61.21,117.09 90 top
U$331  [S23]  63.75,117.09 90 top
U$332  [S00]  58.67,117.09 90 top
U$333  [S0F1]  66.29,117.09 90 top
U$334  [ALARM2]  69.09,96.39 0 top
U$335  [ADT64012]  59.94,123.83 0 top
U$336  [ADT64012]  70.1,107.19 0 bottom
U$337  [ALARM1]  73.91,101.35 90 bottom
U$338  [LED0]  56.13,101.22 90 bottom
U$339  SPARKX-LOGO4  [SPARKX-MEDIUM]  88.39,127.89 0 top
U$340  [(PWR)]  78.49,96.39 0 top
U$341  [GND6]  85.85,90.68 90 top
U$342  [OFF3]  97.92,106.3 90 top
U$343  [ON2]  97.92,112.78 90 top
U$344  [THERMOSTAT0]  82.04,125.6 0 top
U$345  [VCC5]  90.93,90.68 90 top
U$346  [GND6]  85.85,90.68 90 bottom
U$347  [VCC5]  90.93,90.68 90 bottom
U$348  SPARKX-LOGO4  [SPARKX-MEDIUM]  88.39,111.38 0 bottom
U$349  [THERMOSTAT0]  94.74,109.09 0 bottom
U$350  [#ALARM6]  88.39,90.55 90 top
U$351  [#ALARM6]  88.39,90.55 90 bottom
U$352  [01]  77.22,109.6 0 top
U$353  [10]  77.34,114.55 0 top
U$354  [S1F5]  92.2,117.09 90 top
U$355  [S2F7]  94.74,117.09 90 top
U$356  [S12]  84.58,117.09 90 top
U$357  [S23]  87.12,117.09 90 top
U$358  [S00]  82.04,117.09 90 top
U$359  [S0F1]  89.66,117.09 90 top
U$360  [ALARM2]  92.46,96.39 0 top
U$361  [ADT64012]  83.31,123.83 0 top
U$362  [ADT64012]  93.47,107.19 0 bottom
U$363  [ALARM1]  97.28,101.35 90 bottom
U$364  [LED0]  79.5,101.22 90 bottom
U$365  SPARKX-LOGO4  [SPARKX-MEDIUM]  111.76,127.89 0 top
U$366  [(PWR)]  101.85,96.39 0 top
U$367  [GND6]  109.22,90.68 90 top
U$368  [OFF3]  121.29,106.3 90 top
U$369  [ON2]  121.29,112.78 90 top
U$370  [THERMOSTAT0]  105.41,125.6 0 top
U$371  [VCC5]  114.3,90.68 90 top
U$372  [GND6]  109.22,90.68 90 bottom
U$373  [VCC5]  114.3,90.68 90 bottom
U$374  SPARKX-LOGO4  [SPARKX-MEDIUM]  111.76,111.38 0 bottom
U$375  [THERMOSTAT0]  118.11,109.09 0 bottom
U$376  [#ALARM6]  111.76,90.55 90 top
U$377  [#ALARM6]  111.76,90.55 90 bottom
U$378  [01]  100.58,109.6 0 top
U$379  [10]  100.71,114.55 0 top
U$380  [S1F5]  115.57,117.09 90 top
U$381  [S2F7]  118.11,117.09 90 top
U$382  [S12]  107.95,117.09 90 top
U$383  [S23]  110.49,117.09 90 top
U$384  [S00]  105.41,117.09 90 top
U$385  [S0F1]  113.03,117.09 90 top
U$386  [ALARM2]  115.82,96.39 0 top
U$387  [ADT64012]  106.68,123.83 0 top
U$388  [ADT64012]  116.84,107.19 0 bottom
U$389  [ALARM1]  120.65,101.35 90 bottom
U$390  [LED0]  102.87,101.22 90 bottom

## Library data of the parts
C1-C15 = SparkFun-Capacitors; PROD_ID: CAP-00810
D1 D2 D5 D7 D9 D11 D13 D15 D17 D19 D21 D23 D25 D27 D29 = SparkFun-LED; PROD_ID: DIO-00819
D3 D4 D6 D8 D10 D12 D14 D16 D18 D20 D22 D24 D26 D28 D30 = SparkFun-LED; PROD_ID: DIO-09003
E$1-E$4 JP1 JP2 JP5 JP6 JP11-JP14 JP19-JP22 JP27-JP30 JP35-JP38 JP43-JP46 JP51-JP54 JP59-JP62 JP67-JP70 JP75-JP78 JP83-JP86 JP91-JP94 JP99-JP102 JP107-JP110 JP115-JP118 LOGO1-LOGO15 = SparkFun-Aesthetics
E$5 = SparkFun-Retired
J1-J15 = SparkFun-Connectors
JP3 JP4 JP7-JP10 JP15-JP18 JP23-JP26 JP31-JP34 JP39-JP42 JP47-JP50 JP55-JP58 JP63-JP66 JP71-JP74 JP79-JP82 JP87-JP90 JP95-JP98 JP103-JP106 JP111-JP114 JP119 JP120 = SparkFun-Hardware
LED LED1-LED29 = SparkFun-Jumpers
Q1-Q15 = SparkFun-DiscreteSemi; PROD_ID: TRAN-14388
R1 R2 R4 R5 R8-R11 R14-R17 R20-R23 R26-R29 R32-R35 R38-R41 R44-R47 R50-R53 R56-R59 R62-R65 R68-R71 R74-R77 R80-R83 R86-R89 = SparkFun-Resistors; PROD_ID: RES-07828
R3 R6 R7 R12 R13 R18 R19 R24 R25 R30 R31 R36 R37 R42 R43 R48 R49 R54 R55 R60 R61 R66 R67 R72 R73 R78 R79 R84 R85 R90 = SparkFun-Resistors; PROD_ID: RES-07856
SW1-SW15 = SparkFun-Switches; PROD_ID: SWCH-13756
U1-U15 = ADT6401; PROD_ID: IC-15121
U$1 U$17 U$18 U$36 U$53 U$62 U$79 U$88 U$105 U$114 U$131 U$140 U$157 U$166 U$183 U$192 U$209 U$218 U$235 U$244 U$261 U$270 U$287 U$296 U$313 U$322 U$339 U$348 U$365 U$374 = SparkX
U$2 U$8 U$14 U$21-U$23 U$40-U$45 U$66-U$71 U$92-U$97 U$118-U$123 U$144-U$149 U$170-U$175 U$196-U$201 U$222-U$227 U$248-U$253 U$274-U$279 U$300-U$305 U$326-U$331 U$352-U$357 U$378-U$383 = buzzard_labels (13)
U$3 U$15 U$38 U$39 U$64 U$65 U$90 U$91 U$116 U$117 U$142 U$143 U$168 U$169 U$194 U$195 U$220 U$221 U$246 U$247 U$272 U$273 U$298 U$299 U$324 U$325 U$350 U$351 U$376 U$377 = buzzard_labels (12)
U$4 U$12 U$49 U$50 U$75 U$76 U$101 U$102 U$127 U$128 U$153 U$154 U$179 U$180 U$205 U$206 U$231 U$232 U$257 U$258 U$283 U$284 U$309 U$310 U$335 U$336 U$361 U$362 U$387 U$388 = buzzard_labels (5)
U$5-U$7 U$9 U$11 U$13 U$16 U$19 U$29-U$35 U$37 U$55-U$61 U$63 U$81-U$87 U$89 U$107-U$113 U$115 U$133-U$139 U$141 U$159-U$165 U$167 U$185-U$191 U$193 U$211-U$217 U$219 U$237-U$243 U$245 U$263-U$269 U$271 U$289-U$295 U$297 U$315-U$321 U$323 U$341-U$347 U$349 U$367-U$373 U$375 = buzzard_labels (11)
U$10 U$28 U$54 U$80 U$106 U$132 U$158 U$184 U$210 U$236 U$262 U$288 U$314 U$340 U$366 = Labels-0_04
U$20 U$26 U$51 U$52 U$77 U$78 U$103 U$104 U$129 U$130 U$155 U$156 U$181 U$182 U$207 U$208 U$233 U$234 U$259 U$260 U$285 U$286 U$311 U$312 U$337 U$338 U$363 U$364 U$389 U$390 = buzzard_labels (6)
U$24 U$25 U$46 U$47 U$72 U$73 U$98 U$99 U$124 U$125 U$150 U$151 U$176 U$177 U$202 U$203 U$228 U$229 U$254 U$255 U$280 U$281 U$306 U$307 U$332 U$333 U$358 U$359 U$384 U$385 = buzzard_labels (14)
U$27 U$48 U$74 U$100 U$126 U$152 U$178 U$204 U$230 U$256 U$282 U$308 U$334 U$360 U$386 = buzzard_labels (2)

## Nets
!ALARM!: J1.2 Q1.1 R1.1 U1.6
!ALARM!1: J2.2 Q2.1 R8.1 U2.6
!ALARM!2: J3.2 Q3.1 R14.1 U3.6
!ALARM!3: J4.2 Q4.1 R20.1 U4.6
!ALARM!4: J5.2 Q5.1 R26.1 U5.6
!ALARM!5: J6.2 Q6.1 R32.1 U6.6
!ALARM!6: J7.2 Q7.1 R38.1 U7.6
!ALARM!7: J8.2 Q8.1 R44.1 U8.6
!ALARM!8: J9.2 Q9.1 R50.1 U9.6
!ALARM!9: J10.2 Q10.1 R56.1 U10.6
!ALARM!10: J11.2 Q11.1 R62.1 U11.6
!ALARM!11: J12.2 Q12.1 R68.1 U12.6
!ALARM!12: J13.2 Q13.1 R74.1 U13.6
!ALARM!13: J14.2 Q14.1 R80.1 U14.6
!ALARM!14: J15.2 Q15.1 R86.1 U15.6
GND: C1.2 D1.C D3.C J1.1 SW1.10 SW1.11 SW1.12 U1.5
GND1: C2.2 D2.C D4.C J2.1 SW2.10 SW2.11 SW2.12 U2.5
GND2: C3.2 D5.C D6.C J3.1 SW3.10 SW3.11 SW3.12 U3.5
GND3: C4.2 D7.C D8.C J4.1 SW4.10 SW4.11 SW4.12 U4.5
GND4: C5.2 D9.C D10.C J5.1 SW5.10 SW5.11 SW5.12 U5.5
GND5: C6.2 D11.C D12.C J6.1 SW6.10 SW6.11 SW6.12 U6.5
GND6: C7.2 D13.C D14.C J7.1 SW7.10 SW7.11 SW7.12 U7.5
GND7: C8.2 D15.C D16.C J8.1 SW8.10 SW8.11 SW8.12 U8.5
GND8: C9.2 D17.C D18.C J9.1 SW9.10 SW9.11 SW9.12 U9.5
GND9: C10.2 D19.C D20.C J10.1 SW10.10 SW10.11 SW10.12 U10.5
GND10: C11.2 D21.C D22.C J11.1 SW11.10 SW11.11 SW11.12 U11.5
GND11: C12.2 D23.C D24.C J12.1 SW12.10 SW12.11 SW12.12 U12.5
GND12: C13.2 D25.C D26.C J13.1 SW13.10 SW13.11 SW13.12 U13.5
GND13: C14.2 D27.C D28.C J14.1 SW14.10 SW14.11 SW14.12 U14.5
GND14: C15.2 D29.C D30.C J15.1 SW15.10 SW15.11 SW15.12 U15.5
N$1: D2.A R7.1
N$2: LED2.1 R7.2
N$3: D1.A R3.1
N$4: LED.1 R3.2
N$5: LED1.2 Q1.3
N$7: D3.A R6.1
N$8: LED1.1 R6.2
N$10: LED3.2 Q2.3
N$11: D4.A R12.1
N$12: LED3.1 R12.2
N$13: D5.A R13.1
N$14: LED4.1 R13.2
N$16: LED5.2 Q3.3
N$17: D6.A R18.1
N$18: LED5.1 R18.2
N$19: D7.A R19.1
N$20: LED6.1 R19.2
N$22: LED7.2 Q4.3
N$23: D8.A R24.1
N$24: LED7.1 R24.2
N$25: D9.A R25.1
N$26: LED8.1 R25.2
N$28: LED9.2 Q5.3
N$29: D10.A R30.1
N$30: LED9.1 R30.2
N$31: D11.A R31.1
N$32: LED10.1 R31.2
N$34: LED11.2 Q6.3
N$35: D12.A R36.1
N$36: LED11.1 R36.2
N$37: D13.A R37.1
N$38: LED12.1 R37.2
N$40: LED13.2 Q7.3
N$41: D14.A R42.1
N$42: LED13.1 R42.2
N$43: D15.A R43.1
N$44: LED14.1 R43.2
N$46: LED15.2 Q8.3
N$47: D16.A R48.1
N$48: LED15.1 R48.2
N$49: D17.A R49.1
N$50: LED16.1 R49.2
N$52: LED17.2 Q9.3
N$53: D18.A R54.1
N$54: LED17.1 R54.2
N$55: D19.A R55.1
N$56: LED18.1 R55.2
N$58: LED19.2 Q10.3
N$59: D20.A R60.1
N$60: LED19.1 R60.2
N$61: D21.A R61.1
N$62: LED20.1 R61.2
N$64: LED21.2 Q11.3
N$65: D22.A R66.1
N$66: LED21.1 R66.2
N$67: D23.A R67.1
N$68: LED22.1 R67.2
N$70: LED23.2 Q12.3
N$71: D24.A R72.1
N$72: LED23.1 R72.2
N$73: D25.A R73.1
N$74: LED24.1 R73.2
N$76: LED25.2 Q13.3
N$77: D26.A R78.1
N$78: LED25.1 R78.2
N$79: D27.A R79.1
N$80: LED26.1 R79.2
N$82: LED27.2 Q14.3
N$83: D28.A R84.1
N$84: LED27.1 R84.2
N$85: D29.A R85.1
N$86: LED28.1 R85.2
N$88: LED29.2 Q15.3
N$89: D30.A R90.1
N$90: LED29.1 R90.2
S0: SW1.4 U1.3
S0_PU: R2.1 SW1.1 SW1.9
S0_PU1: R9.1 SW2.1 SW2.9
S0_PU2: R15.1 SW3.1 SW3.9
S0_PU3: R21.1 SW4.1 SW4.9
S0_PU4: R27.1 SW5.1 SW5.9
S0_PU5: R33.1 SW6.1 SW6.9
S0_PU6: R39.1 SW7.1 SW7.9
S0_PU7: R45.1 SW8.1 SW8.9
S0_PU8: R51.1 SW9.1 SW9.9
S0_PU9: R57.1 SW10.1 SW10.9
S0_PU10: R63.1 SW11.1 SW11.9
S0_PU11: R69.1 SW12.1 SW12.9
S0_PU12: R75.1 SW13.1 SW13.9
S0_PU13: R81.1 SW14.1 SW14.9
S0_PU14: R87.1 SW15.1 SW15.9
S1: SW1.5 U1.2
S1_PU: R4.1 SW1.2 SW1.8
S1_PU1: R10.1 SW2.2 SW2.8
S1_PU2: R16.1 SW3.2 SW3.8
S1_PU3: R22.1 SW4.2 SW4.8
S1_PU4: R28.1 SW5.2 SW5.8
S1_PU5: R34.1 SW6.2 SW6.8
S1_PU6: R40.1 SW7.2 SW7.8
S1_PU7: R46.1 SW8.2 SW8.8
S1_PU8: R52.1 SW9.2 SW9.8
S1_PU9: R58.1 SW10.2 SW10.8
S1_PU10: R64.1 SW11.2 SW11.8
S1_PU11: R70.1 SW12.2 SW12.8
S1_PU12: R76.1 SW13.2 SW13.8
S1_PU13: R82.1 SW14.2 SW14.8
S1_PU14: R88.1 SW15.2 SW15.8
S2: SW1.6 U1.1
S2_PU: R5.1 SW1.3 SW1.7
S2_PU1: R11.1 SW2.3 SW2.7
S2_PU2: R17.1 SW3.3 SW3.7
S2_PU3: R23.1 SW4.3 SW4.7
S2_PU4: R29.1 SW5.3 SW5.7
S2_PU5: R35.1 SW6.3 SW6.7
S2_PU6: R41.1 SW7.3 SW7.7
S2_PU7: R47.1 SW8.3 SW8.7
S2_PU8: R53.1 SW9.3 SW9.7
S2_PU9: R59.1 SW10.3 SW10.7
S2_PU10: R65.1 SW11.3 SW11.7
S2_PU11: R71.1 SW12.3 SW12.7
S2_PU12: R77.1 SW13.3 SW13.7
S2_PU13: R83.1 SW14.3 SW14.7
S2_PU14: R89.1 SW15.3 SW15.7
S3: SW2.4 U2.3
S4: SW2.5 U2.2
S5: SW2.6 U2.1
S6: SW3.4 U3.3
S7: SW3.5 U3.2
S8: SW3.6 U3.1
S9: SW4.4 U4.3
S10: SW4.5 U4.2
S11: SW4.6 U4.1
S12: SW5.4 U5.3
S13: SW5.5 U5.2
S14: SW5.6 U5.1
S15: SW6.4 U6.3
S16: SW6.5 U6.2
S17: SW6.6 U6.1
S18: SW7.4 U7.3
S19: SW7.5 U7.2
S20: SW7.6 U7.1
S21: SW8.4 U8.3
S22: SW8.5 U8.2
S23: SW8.6 U8.1
S24: SW9.4 U9.3
S25: SW9.5 U9.2
S26: SW9.6 U9.1
S27: SW10.4 U10.3
S28: SW10.5 U10.2
S29: SW10.6 U10.1
S30: SW11.4 U11.3
S31: SW11.5 U11.2
S32: SW11.6 U11.1
S33: SW12.4 U12.3
S34: SW12.5 U12.2
S35: SW12.6 U12.1
S36: SW13.4 U13.3
S37: SW13.5 U13.2
S38: SW13.6 U13.1
S39: SW14.4 U14.3
S40: SW14.5 U14.2
S41: SW14.6 U14.1
S42: SW15.4 U15.3
S43: SW15.5 U15.2
S44: SW15.6 U15.1
VCC: C1.1 J1.3 LED.2 Q1.2 R1.2 R2.2 R4.2 R5.2 U1.4
VCC1: C2.1 J2.3 LED2.2 Q2.2 R8.2 R9.2 R10.2 R11.2 U2.4
VCC2: C3.1 J3.3 LED4.2 Q3.2 R14.2 R15.2 R16.2 R17.2 U3.4
VCC3: C4.1 J4.3 LED6.2 Q4.2 R20.2 R21.2 R22.2 R23.2 U4.4
VCC4: C5.1 J5.3 LED8.2 Q5.2 R26.2 R27.2 R28.2 R29.2 U5.4
VCC5: C6.1 J6.3 LED10.2 Q6.2 R32.2 R33.2 R34.2 R35.2 U6.4
VCC6: C7.1 J7.3 LED12.2 Q7.2 R38.2 R39.2 R40.2 R41.2 U7.4
VCC7: C8.1 J8.3 LED14.2 Q8.2 R44.2 R45.2 R46.2 R47.2 U8.4
VCC8: C9.1 J9.3 LED16.2 Q9.2 R50.2 R51.2 R52.2 R53.2 U9.4
VCC9: C10.1 J10.3 LED18.2 Q10.2 R56.2 R57.2 R58.2 R59.2 U10.4
VCC10: C11.1 J11.3 LED20.2 Q11.2 R62.2 R63.2 R64.2 R65.2 U11.4
VCC11: C12.1 J12.3 LED22.2 Q12.2 R68.2 R69.2 R70.2 R71.2 U12.4
VCC12: C13.1 J13.3 LED24.2 Q13.2 R74.2 R75.2 R76.2 R77.2 U13.4
VCC13: C14.1 J14.3 LED26.2 Q14.2 R80.2 R81.2 R82.2 R83.2 U14.4
VCC14: C15.1 J15.3 LED28.2 Q15.2 R86.2 R87.2 R88.2 R89.2 U15.4